# EAGLE board smd_circuit (EAGLE 5.11)
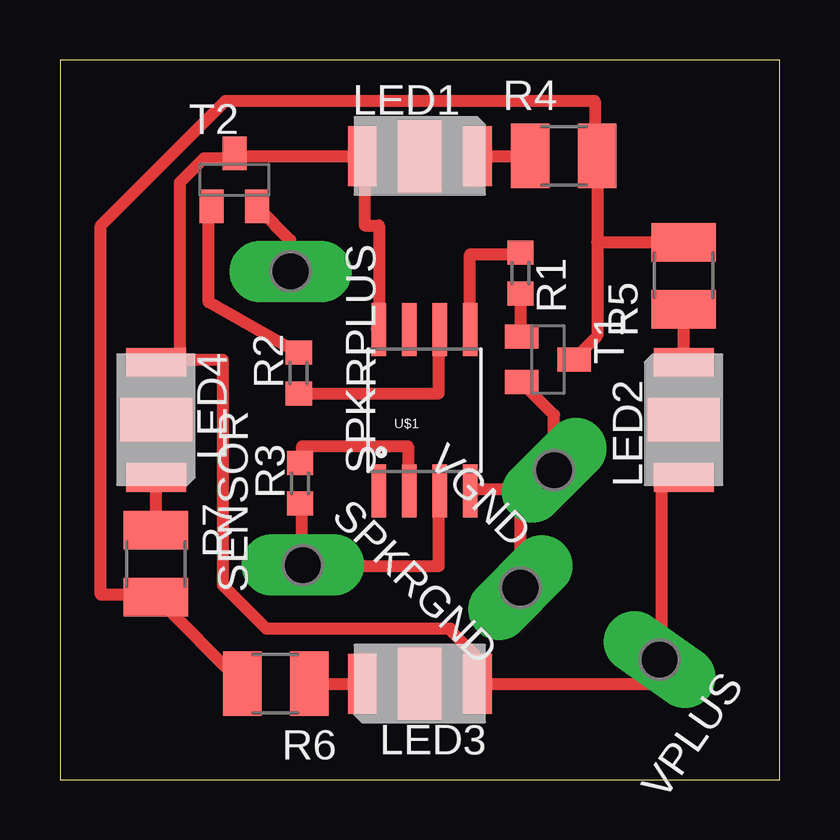
[diagram p0: board, top side]

Size 30 x 30 mm. Coordinates in mm from the lower left corner, seen from the top.
Outline: 0,0 30,0 30,30 0,30 0,0
Copper layers (1*16): Top 0.035mm / dielectric 1.5mm / Bottom 0.035mm
Design rules "default *": minimum track width 20mil, minimum drill 24mil, track to track 20mil, track to pad 20mil, pad to pad 20mil, via to via 20mil, smd to smd 20mil, copper to edge 20mil, drill to drill 8mil, minimum pad ring 10mil, minimum via ring 8mil, stop-mask expansion 4mil, vias tented up to drill 0mil, thermal gap 10mil

## Footprints (pad centres in the part's own frame; a part is rotated, then mirrored left to right if it is on the bottom)
OPTEK-DURIS5 = smd 2.5 x 1.2: ANODE 0,-2.4; CATHODE 0,2.4 | smd 3 x 1.8: P$5 0,0
R0603 = smd 1 x 1.1: 1 -0.85,0; 2 0.85,0
R1210 = smd 1.6 x 2.7: 1 -1.4,0; 2 1.4,0
P1-17Y = drill 1.702 pad 2.121 long: TP 0,0
SOT23-BEC = smd 1 x 1.4: B -0.95,-1.1; C 0,1.1; E 0.95,-1.1
SO08-EIAJ = smd 0.61 x 2.21: 1 -1.905,-3.378; 2 -0.635,-3.378; 3 0.635,-3.378; 4 1.905,-3.378; 5 1.905,3.353; 6 0.635,3.353; 7 -0.635,3.353; 8 -1.905,3.353

## Placement (x,y rotation side)
LED1  [OPTEK-DURIS5]  15,26 270 top
LED2  [OPTEK-DURIS5]  26,15 0 top
LED3  [OPTEK-DURIS5]  15,4 90 top
LED4  [OPTEK-DURIS5]  4,15 180 top
R1  [R0603]  19.2,21.11 270 top
R2  [R0603]  9.95,16.95 90 top
R3  [R0603]  10.01,12.36 90 top
R4  [R1210]  21,26 0 top
R5  [R1210]  26,21 90 top
R6  [R1210]  9,4 180 top
R7  [R1210]  4,9 270 top
SENSOR  PTR1PAD1-17Y  [P1-17Y]  10.13,8.94 90 top
SPKRGND  PTR1PAD1-17Y  [P1-17Y]  19.2,8 135 top
SPKRPLUS  PTR1PAD1-17Y  [P1-17Y]  9.61,21.19 270 top
T1  [SOT23-BEC]  20.34,17.51 270 top
T2  [SOT23-BEC]  7.27,25 0 top
U$1  ATTINY45  [SO08-EIAJ]  15.2,15.4 0 top
VGND  PTR1PAD1-17Y  [P1-17Y]  20.6,12.9 135 top
VPLUS  PTR1PAD1-17Y  [P1-17Y]  25,5 235 top

## Library data of the parts
LED1-LED4 T1 T2 = smd_parts
R1-R7 = rcl
SENSOR SPKRGND SPKRPLUS VGND VPLUS = testpad
U$1 = SparkFun

## Nets
+5V: LED1.ANODE LED2.ANODE LED3.ANODE LED4.ANODE T2.C U$1.8 VPLUS.TP
GNDA: SPKRGND.TP T1.E U$1.4 VGND.TP
N$1: R3.2 U$1.2
N$3: R2.1 U$1.6
N$4: R2.2 T2.B
N$5: R4.2 R5.2 R6.2 R7.2 T1.C
N$6: R1.2 T1.B
N$7: R1.1 U$1.5
N$8: SPKRPLUS.TP T2.E
N$9: LED1.CATHODE R4.1
N$10: LED2.CATHODE R5.1
N$11: LED3.CATHODE R6.1
N$12: LED4.CATHODE R7.1
N$19: R3.1 SENSOR.TP U$1.3

## Tracks (layer width: path | path; a pad name or v marks a point on that pad's centre or on a via)
+5V
  Top 0.508: U$1.8 13.2,18.8 13.3,19 13.3,23.1 12.7,23.1 12.7,25.8 LED1.ANODE 7.3,26 T2.C 7.1,25.9 6,25.9 5,24.9 5,17.5 | 5,17.5 LED4.ANODE 4.5,17.4 5,17.5 | LED2.ANODE 25.1,12.7 25.1,5.2 VPLUS.TP 25,4 LED3.ANODE 17.3,4.2 17.3,5.2 16.3,6.2 16.3,6.3 8.6,6.3 6.8,8.1 6.8,17.5 5,17.5
GNDA
  Top 0.508: VGND.TP 20.6,15.2 19.3,16.5 T1.E | U$1.4 17.2,12.1 20.4,12.1 20.4,12.8 VGND.TP | SPKRGND.TP 19.2,11.9 VGND.TP
N$1
  Top 0.508: R3.2 10.1,13.3 10.1,13.9 14.5,13.9 14.5,12.1 U$1.2
N$3
  Top 0.508: R2.1 10,16.1 15.8,16.1 15.8,18.7 U$1.6
N$4
  Top 0.508: R2.2 9.9,17.8 6.2,19.9 6.2,23.7 6.3,23.8 T2.B
N$5
  Top 0.508: R6.2 R7.2 3.8,7.7 1.7,7.7 1.7,23.1 6.9,28.3 22.3,28.3 22.3,26.2 R4.2 22.4,22.4 | 22.4,22.4 22.4,18.5 21.5,17.6 T1.C | 22.4,22.4 R5.2
N$6
  Top 0.508: R1.2 19.2,20.2 19.2,18.5 T1.B
N$7
  Top 0.508: R1.1 19.1,21.9 17.1,21.9 17.1,18.8 U$1.5
N$8
  Top 0.508: T2.E 8.3,23.8 9.6,22.5 SPKRPLUS.TP
N$9
  Top 0.508: LED1.CATHODE R4.1
N$10
  Top 0.508: LED2.CATHODE R5.1
N$11
  Top 0.508: R6.1 LED3.CATHODE
N$12
  Top 0.508: R7.1 LED4.CATHODE
N$19
  Top 0.508: R3.1 10.1,11.5 10.1,9 SENSOR.TP 10.8,8.9 15.8,8.9 15.8,12 U$1.3